# Altium PCB MB_SpectrumAnalyzer.PcbDoc (part 1 of 3)
Units mil, origin at the board's own origin, x right, y up, seen from the top; angles counter-clockwise.
Board outline 6149 x 3004 mil, 2 copper layers (Top Layer, Bottom Layer); 237 components, 180 nets, 644 pads, 101 vias.
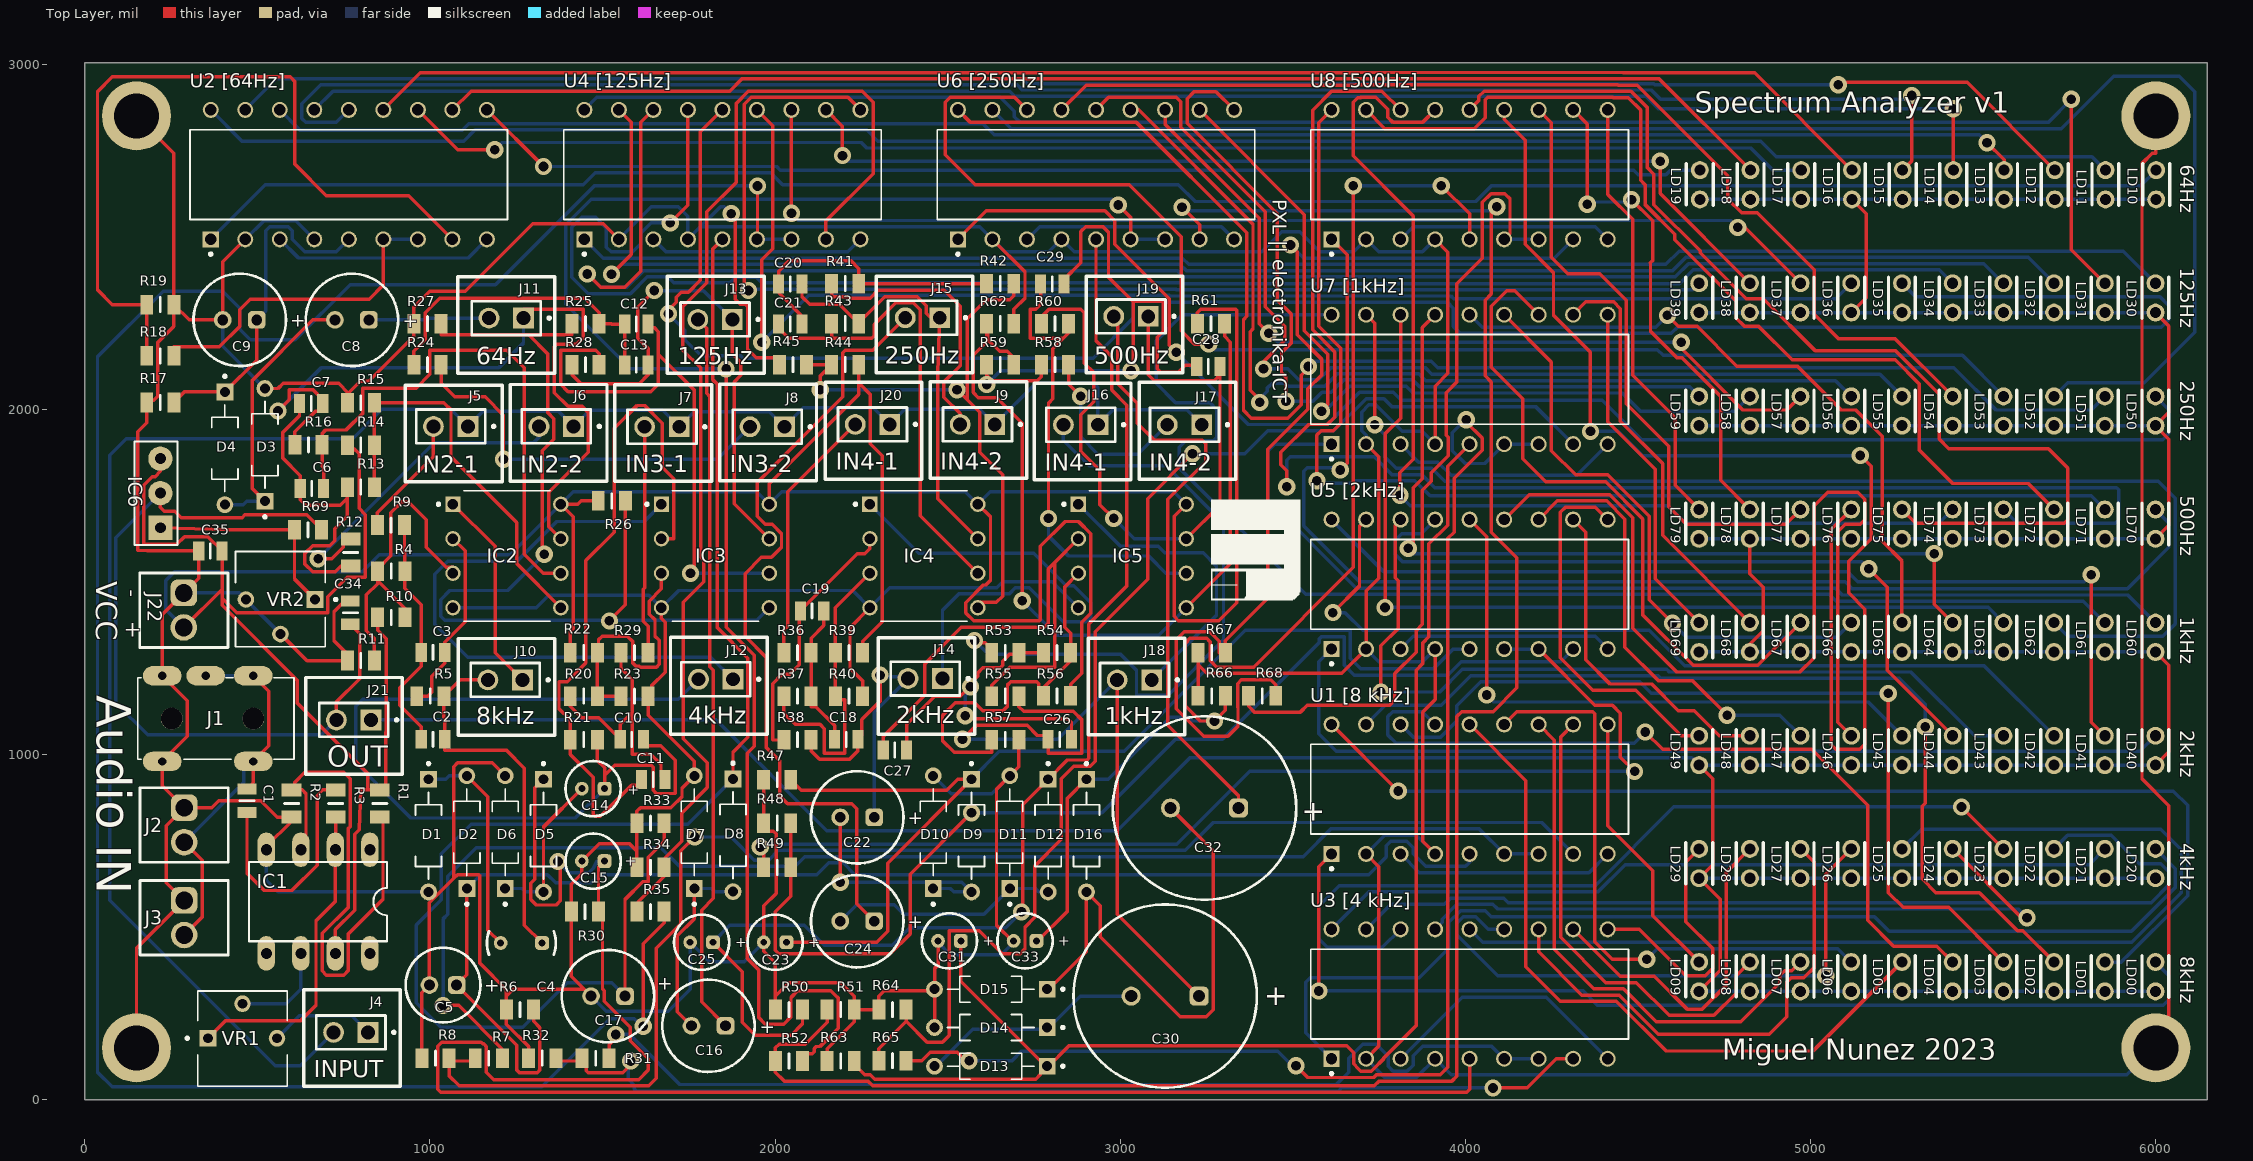
[diagram p0: Top Layer view]
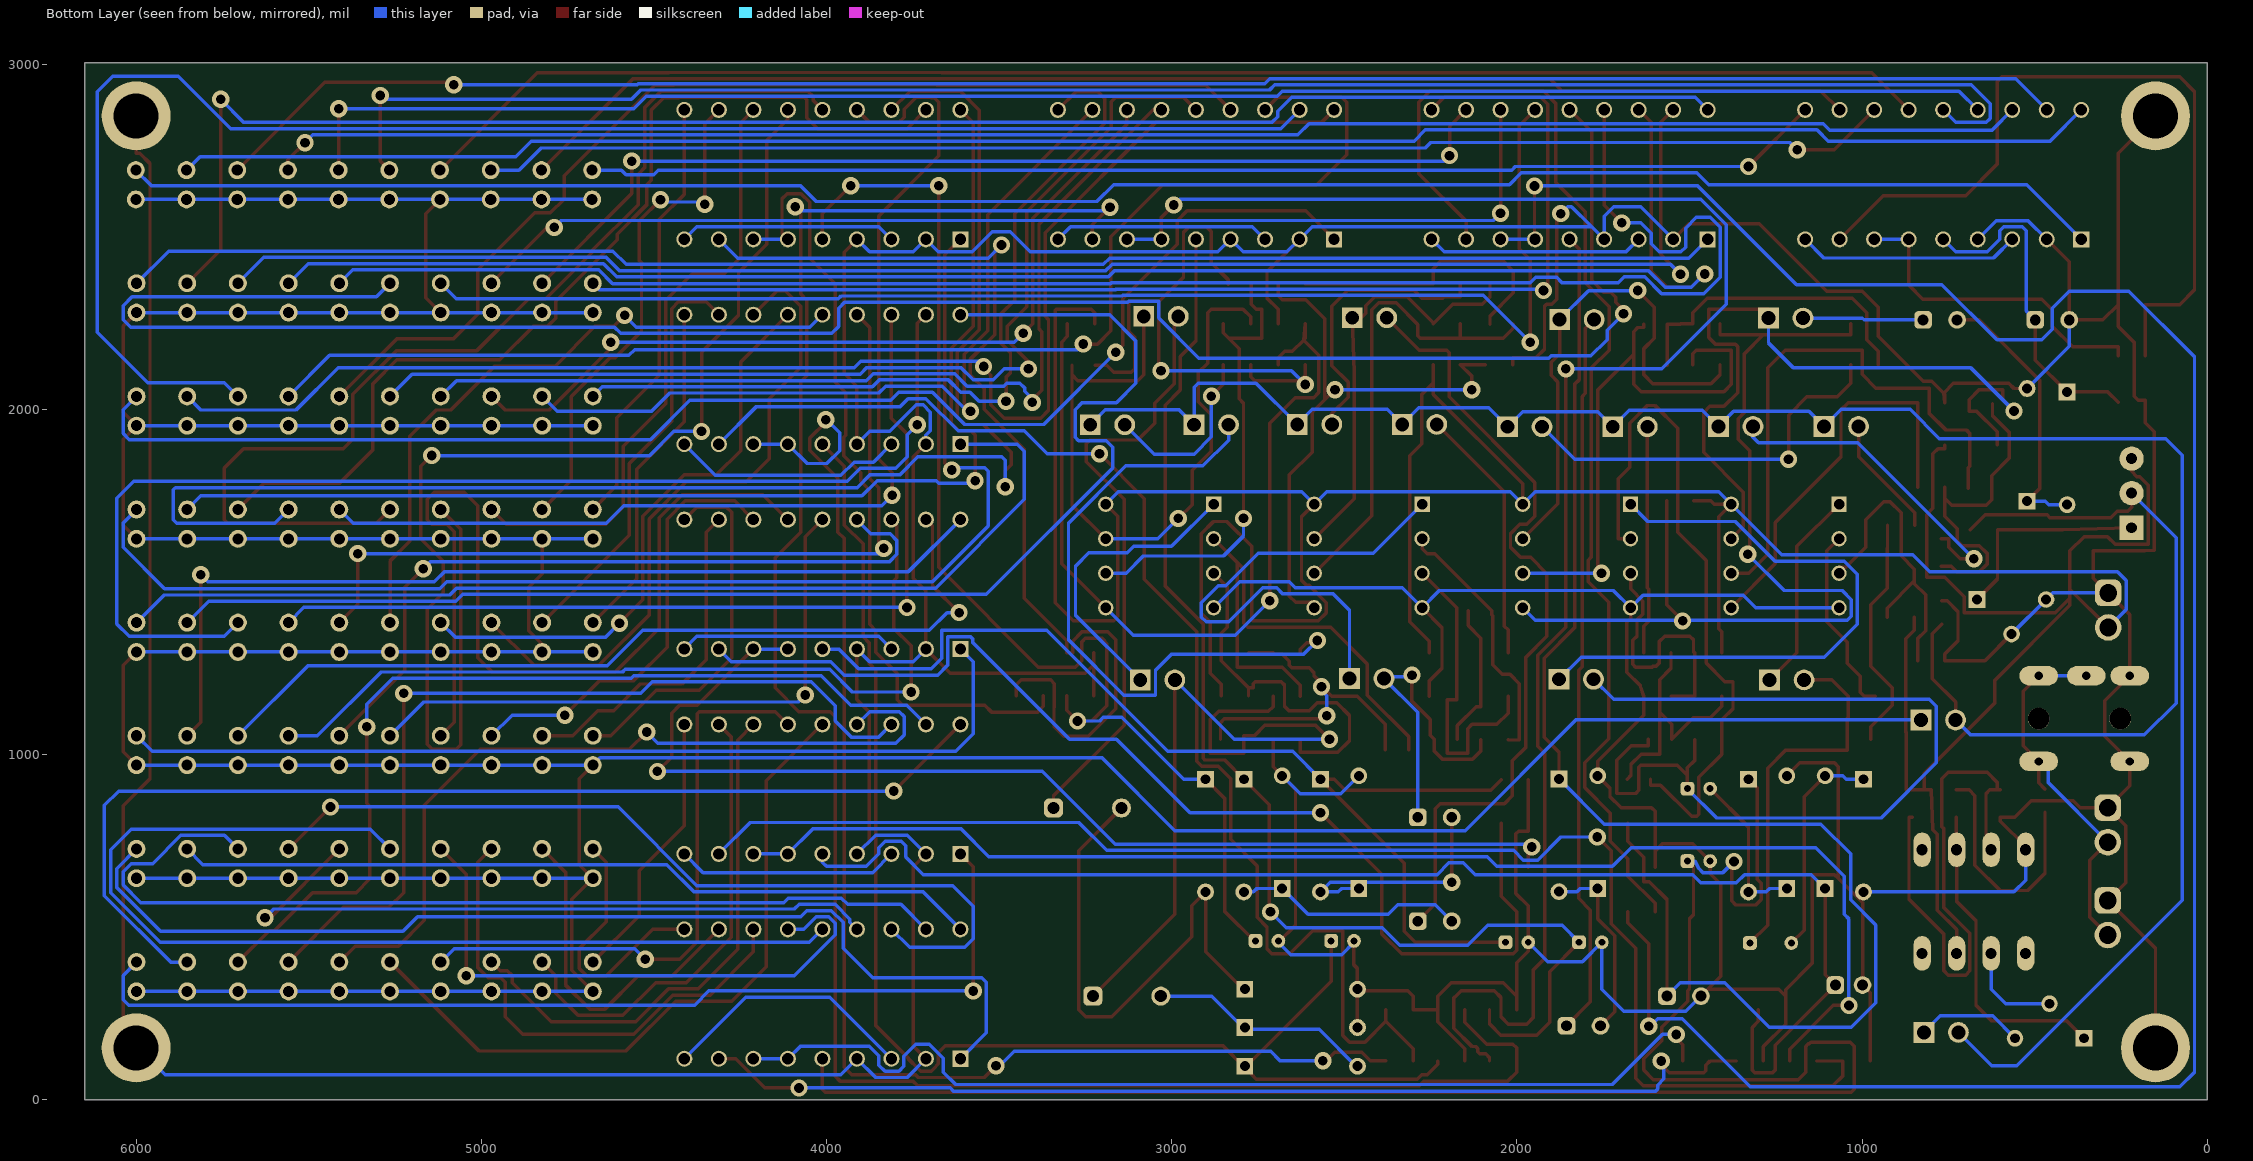
[diagram p1: Bottom Layer view, seen from below]

## Layer stack, top to bottom
Top Solder: solder mask 0.4, Solder Resist, Dk 3.5
Top Layer: signal copper 1.4
Dielectric 1: dielectric 12.6, FR-4, Dk 4.8
Bottom Layer: signal copper 1.4
Bottom Solder: solder mask 0.4, Solder Resist, Dk 3.5

## Board outline
0,0 6149,0 6149,3004 0,3004

## Design rules (kind name [scope] priority, off if disabled: settings)
Clearance [All] p1: gap=8 ignorepadtopadclearanceinfootprint=FALSE except(0: Arc-Hole Track-Hole SMDPad-Hole THPad-Hole Via-Hole Fill-Hole Poly-Hole Region-Hole Text-Hole; 2: Arc-Text Track-Text SMDPad-Text THPad-Text Via-Text Fill-Text Poly-Text Region-Text Text-Text)
Height [All] p1: minheight=0 maxheight=2000 prefheight=500
HoleSize [All] p1: absolutevalues=TRUE maxlimit=250 minlimit=1 maxpercent=80.000 minpercent=20.000
MinimumSolderMaskSliver [All] p1: minsoldermaskwidth=5
PolygonConnect [All] p1: connectstyle=Relief reliefconductorwidth=10 reliefentries=4 polygonreliefangle="90 Angle" airgapwidth=10
RoutingVias [All] p1: holewidth=28 width=50 viastyle="Through Hole" minholewidth=28 minwidth=50 maxholewidth=28 maxwidth=50
SMDNeckDown [All] p1: percent=50.000
SilkToSilkClearance [All] p1: silktosilkclearance=0
SilkToSolderMaskClearance [IsPad] p1: minsilkscreentomaskgap=0 clearancetoexposedcopper=TRUE
SolderMaskExpansion [All] p1: expansion=4 istentingtop=FALSE
Width [All] p1: maxlimit=10 minlimit=10 preferedwidth=10
25 further rules are at their usual default settings.

## Classes and differential pairs
component class spectrum_8kHz_64Hz: C2 C3 C4 C5 C6 C7 C8 C9 D1 D2 D3 D4 IC2 J5 J6 J10 J11 "L 09" LD00 LD01 LD02 LD03 LD04 LD05 LD06 LD07 LD08 LD10 LD11 LD12 LD13 LD14 LD15 LD16 LD17 LD18 LD19 R4 R5 R6 R7 R8 R9 R10 R11 R12 R13 R14 R15 R16 R17 R18 R19 "U1 [8 kHz]" "U2 [64Hz]"
component class spectrum_4kHz_125Hz: C10 C11 C12 C13 C14 C15 C16 C17 D5 D6 D7 D8 IC3 J7 J8 J12 J13 LD20 LD21 LD22 LD23 LD24 LD25 LD26 LD27 LD28 LD29 LD30 LD31 LD32 LD33 LD34 LD35 LD36 LD37 LD38 LD39 R20 R21 R22 R23 R24 R25 R26 R27 R28 R29 R30 R31 R32 R33 R34 R35 "U3 [4 kHz]" "U4 [125Hz]"
component class spectrum_2kHz_250Hz: C18 C19 C20 C21 C22 C23 C24 C25 D9 D10 D11 D12 IC4 J9 J14 J15 J20 LD40 LD41 LD42 LD43 LD44 LD45 LD46 LD47 LD48 LD49 LD50 LD51 LD52 LD53 LD54 LD55 LD56 LD57 LD58 LD59 R36 R37 R38 R39 R40 R41 R42 R43 R44 R45 R47 R48 R49 R50 R51 R52 "U5 [2kHz]" "U6 [250Hz]"
component class spectrum_1kHz_500Hz: C26 C27 C28 C29 C30 C31 C32 C33 D13 D14 D15 D16 IC5 J16 J17 J18 J19 LD60 LD61 LD62 LD63 LD64 LD65 LD66 LD67 LD68 LD69 LD70 LD71 LD72 LD73 LD74 LD75 LD76 LD77 LD78 LD79 R53 R54 R55 R56 R57 R58 R59 R60 R61 R62 R63 R64 R65 R66 R67 R68 "U7 [1kHz]" "U8 [500Hz]"
component class AudioOUT: C34 C35 IC6 J22 R69 VR2
component class AudioIN: C1 IC1 J1 J2 J3 J4 R1 R2 R3 VR1

## Components (designator, comment, footprint, x,y, rotation, side; value= is the part's Value field where it differs from the comment)
C1 "100nF" CAPC2012X65N 470,865.87 r270 top
C2 "10nF" CAPC2012X65N 1009,1044 r0 top
C3 "10nF" CAPC2012X65N 1009,1296 r0 top
C4 "100nF" "100nF keramic disk" 1265,454 r0 top
C5 "1µF" WCAP-ATG8_D5H11 1038,332 r0 top
C6 "330nF" CAPC2012X65N 658,1771 r180 top
C7 "330nF" CAPC2012X65N 656,2016.88 r180 top
C8 "100uF" WCAP-ATG8_D6.3H11 774,2259 r0 top
C9 "47uF" WCAP-ATG8_D6.3H11 449,2259 r0 top
C10 "47nF" CAPC2012X65N 1585,1044 r0 top
C11 "47nF" CAPC2012X65N 1646.87,928 r180 top
C12 "220nF" CAPC2012X65N 1598,2246.82 r180 top
C13 "220nF" CAPC2012X65N 1598,2128 r180 top
C14 "1uF" WCAP-MN_D4H8 1473,901 r0 top
C15 "1uF" WCAP-MN_D4H8 1473,691 r0 top
C16 "47uF" WCAP-ATG8_D6.3H11 1807,214 r0 top
C17 "47uF" WCAP-ATG8_D6.3H11 1516,300 r0 top
C18 "47nF" CAPC2012X65N 2206.13,1044 r0 top
C19 "47nF" CAPC2012X65N 2107.13,1416 r180 top
C20 "220nF" CAPC2012X65N 2044,2362.82 r180 top
C21 "220nF" CAPC2012X65N 2044,2246.82 r0 top
C22 "4,7uF" WCAP-ATG8_D6.3H11 2238,818 r0 top
C23 "1uF" WCAP-MN_D4H8 2000,456 r0 top
C24 "47uF" WCAP-ATG8_D6.3H11 2238,517 r0 top
C25 "1uF" WCAP-MN_D4H8 1787,456 r0 top
C26 "47nF" CAPC2012X65N 2824.75,1044 r180 top
C27 "47nF" CAPC2012X65N 2347,1013 r180 top
C28 "68nF" CAPC2012X65N 3255,2124 r180 top
C29 "68nF" CAPC2012X65N 2803,2362.82 r0 top
C30 "22uF" WCAP-ATG8_D13H20 3130,300 r0 top
C31 "1uF" WCAP-MN_D4H8 2505,460 r0 top
C32 "22uF" WCAP-ATG8_D13H20 3244,845 r0 top
C33 "1uF" WCAP-MN_D4H8 2724,460 r0 top
C34 "1uF" CAPC2012X65N 769.29,1411 r270 top
C35 "100nF" CAPC2012X65N 364,1590 r0 top
D1 "1N4148" DIOAD829W49L456D191 996,765 r270 top
D2 "1N4148" DIOAD829W49L456D191 1107,775 r90 top
D3 "1N4148" DIOAD829W49L456D191 522,1897 r90 top
D4 "1N4148" DIOAD829W49L456D191 406,1887 r270 top
D5 "1N4148" DIOAD829W49L456D191 1329,765 r270 top
D6 "1N4148" DIOAD829W49L456D191 1218,775 r90 top
D7 "1N4148" DIOAD829W49L456D191 1766,775 r90 top
D8 "1N4148" DIOAD829W49L456D191 1878,766 r270 top
D9 "1N4148" DIOAD829W49L456D191 2569,765 r270 top
D10 "1N4148" DIOAD829W49L456D191 2458,775 r90 top
D11 "1N4148" DIOAD829W49L456D191 2680,775 r90 top
D12 "1N4148" DIOAD829W49L456D191 2791,765 r270 top
D13 "1N4148" DIOAD829W49L456D191 2625,97 r180 top
D14 "1N4148" DIOAD829W49L456D191 2625,209 r180 top
D15 "1N4148" DIOAD829W49L456D191 2625,320 r180 top
D16 "1N4148" DIOAD829W49L456D191 2902,765 r270 top
IC1 "TL071" DIL08 676,574 r180 top
IC2 "TL072IP" DIP794W45P254L959H508Q8 1223,1575 r0 top
IC3 "TL072IP" DIP794W45P254L959H508Q8 1827,1575 r0 top
IC4 "TL072IP" DIP794W45P254L959H508Q8 2431,1575 r0 top
IC5 "TL072IP" DIP794W45P254L959H508Q8 3035,1575 r0 top
IC6 "LM317" TO-220 219,1757 r90 top
J1 "PJ-313 3,5mm jack" *PJ-313_PJ-313(Primary) 380,1104 r0 top
J2 "2 pin block connector" 691210910002 287.93,795.86 r270 top
J3 "2 pin block connector" 691210910002 287.93,527 r270 top
J4 "2 pin header" SAMTEC_HTSW-102-07-TM-S 771,195 r0 top
J5 "2 pin header" SAMTEC_HTSW-102-07-TM-S 1060.13,1950.33 r0 top
J6 "2 pin header" SAMTEC_HTSW-102-07-TM-S 1366.13,1950.33 r0 top
J7 "2 pin header" SAMTEC_HTSW-102-07-TM-S 1672.13,1949.33 r0 top
J8 "2 pin header" SAMTEC_HTSW-102-07-TM-S 1977.13,1949.33 r0 top
J9 "2 pin header" SAMTEC_HTSW-102-07-TM-S 2586.13,1956.33 r0 top
J10 "2 pin header" SAMTEC_HTSW-102-07-TM-S 1218,1216 r0 top
J11 "2 pin header" SAMTEC_HTSW-102-07-TM-S 1221.13,2264.33 r0 top
J12 "2 pin header" SAMTEC_HTSW-102-07-TM-S 1828,1218 r0 top
J13 "2 pin header" SAMTEC_HTSW-102-07-TM-S 1826.13,2260.33 r0 top
J14 "2 pin header" SAMTEC_HTSW-102-07-TM-S 2435,1220 r0 top
J15 "2 pin header" SAMTEC_HTSW-102-07-TM-S 2427.13,2265.33 r0 top
J16 "2 pin header" SAMTEC_HTSW-102-07-TM-S 2885.13,1955.33 r0 top
J17 "2 pin header" SAMTEC_HTSW-102-07-TM-S 3186.13,1955.33 r0 top
J18 "2 pin header" SAMTEC_HTSW-102-07-TM-S 3041,1216 r0 top
J19 "2 pin header" SAMTEC_HTSW-102-07-TM-S 3031.13,2269.33 r0 top
J20 "2 pin header" SAMTEC_HTSW-102-07-TM-S 2282.13,1956.33 r0 top
J21 "2 pin header" SAMTEC_HTSW-102-07-TM-S 779,1100 r0 top
J22 "2 pin block connector" 691210910002 287,1418 r270 top
LD00 "LED 2x3x4" "LED 2x3x4mm" 5999,356.71 r90 top (schematic designator LED00)
LD01 "LED 2x3x4" "LED 2x3x4mm" 5852.11,356.71 r90 top (schematic designator LED01)
LD02 "LED 2x3x4" "LED 2x3x4mm" 5705.22,356.71 r90 top (schematic designator LED02)
LD03 "LED 2x3x4" "LED 2x3x4mm" 5558.33,356.71 r90 top (schematic designator LED03)
LD04 "LED 2x3x4" "LED 2x3x4mm" 5411.44,356.71 r90 top (schematic designator LED04)
LD05 "LED 2x3x4" "LED 2x3x4mm" 5264.56,356.71 r90 top (schematic designator LED05)
LD06 "LED 2x3x4" "LED 2x3x4mm" 5117.67,356.71 r90 top (schematic designator LED06)
LD07 "LED 2x3x4" "LED 2x3x4mm" 4970.78,356.71 r90 top (schematic designator LED07)
LD08 "LED 2x3x4" "LED 2x3x4mm" 4823.89,356.71 r90 top (schematic designator LED08)
LD09 "LED 2x3x4" "LED 2x3x4mm" 4677,356.71 r90 top (schematic designator LED09)
LD10 "LED 2x3x4" "LED 2x3x4mm" 6001,2651 r90 top (schematic designator LED10)
LD11 "LED 2x3x4" "LED 2x3x4mm" 5854.11,2651 r90 top (schematic designator LED11)
LD12 "LED 2x3x4" "LED 2x3x4mm" 5707.22,2651 r90 top (schematic designator LED12)
LD13 "LED 2x3x4" "LED 2x3x4mm" 5560.33,2651 r90 top (schematic designator LED13)
LD14 "LED 2x3x4" "LED 2x3x4mm" 5413.44,2651 r90 top (schematic designator LED14)
LD15 "LED 2x3x4" "LED 2x3x4mm" 5266.56,2651 r90 top (schematic designator LED15)
LD16 "LED 2x3x4" "LED 2x3x4mm" 5119.67,2651 r90 top (schematic designator LED16)
LD17 "LED 2x3x4" "LED 2x3x4mm" 4972.78,2651 r90 top (schematic designator LED17)
LD18 "LED 2x3x4" "LED 2x3x4mm" 4825.89,2651 r90 top (schematic designator LED18)
LD19 "LED 2x3x4" "LED 2x3x4mm" 4679,2651 r90 top (schematic designator LED19)
LD20 "LED 2x3x4" "LED 2x3x4mm" 5999,684.47 r90 top (schematic designator LED20)
LD21 "LED 2x3x4" "LED 2x3x4mm" 5852.11,684.47 r90 top (schematic designator LED21)
LD22 "LED 2x3x4" "LED 2x3x4mm" 5705.22,684.47 r90 top (schematic designator LED22)
LD23 "LED 2x3x4" "LED 2x3x4mm" 5558.33,684.47 r90 top (schematic designator LED23)
LD24 "LED 2x3x4" "LED 2x3x4mm" 5411.44,684.47 r90 top (schematic designator LED24)
LD25 "LED 2x3x4" "LED 2x3x4mm" 5264.56,684.47 r90 top (schematic designator LED25)
LD26 "LED 2x3x4" "LED 2x3x4mm" 5117.67,684.47 r90 top (schematic designator LED26)
LD27 "LED 2x3x4" "LED 2x3x4mm" 4970.78,684.47 r90 top (schematic designator LED27)
LD28 "LED 2x3x4" "LED 2x3x4mm" 4823.89,684.47 r90 top (schematic designator LED28)
LD29 "LED 2x3x4" "LED 2x3x4mm" 4677,684.47 r90 top (schematic designator LED29)
LD30 "LED 2x3x4" "LED 2x3x4mm" 5999,2323.24 r90 top (schematic designator LED30)
LD31 "LED 2x3x4" "LED 2x3x4mm" 5852.11,2323.24 r90 top (schematic designator LED31)
LD32 "LED 2x3x4" "LED 2x3x4mm" 5705.22,2323.24 r90 top (schematic designator LED32)
LD33 "LED 2x3x4" "LED 2x3x4mm" 5558.33,2323.24 r90 top (schematic designator LED33)
LD34 "LED 2x3x4" "LED 2x3x4mm" 5411.44,2323.24 r90 top (schematic designator LED34)
LD35 "LED 2x3x4" "LED 2x3x4mm" 5264.56,2323.24 r90 top (schematic designator LED35)
LD36 "LED 2x3x4" "LED 2x3x4mm" 5117.67,2323.24 r90 top (schematic designator LED36)
LD37 "LED 2x3x4" "LED 2x3x4mm" 4970.78,2323.24 r90 top (schematic designator LED37)
LD38 "LED 2x3x4" "LED 2x3x4mm" 4823.89,2323.24 r90 top (schematic designator LED38)
LD39 "LED 2x3x4" "LED 2x3x4mm" 4677,2323.24 r90 top (schematic designator LED39)
LD40 "LED 2x3x4" "LED 2x3x4mm" 5999,1012.22 r90 top (schematic designator LED40)
LD41 "LED 2x3x4" "LED 2x3x4mm" 5852.11,1012.22 r90 top (schematic designator LED41)
LD42 "LED 2x3x4" "LED 2x3x4mm" 5705.22,1012.22 r90 top (schematic designator LED42)
LD43 "LED 2x3x4" "LED 2x3x4mm" 5558.33,1012.22 r90 top (schematic designator LED43)
LD44 "LED 2x3x4" "LED 2x3x4mm" 5411.44,1012.22 r90 top (schematic designator LED44)
LD45 "LED 2x3x4" "LED 2x3x4mm" 5264.56,1012.22 r90 top (schematic designator LED45)
LD46 "LED 2x3x4" "LED 2x3x4mm" 5117.67,1012.22 r90 top (schematic designator LED46)
LD47 "LED 2x3x4" "LED 2x3x4mm" 4970.78,1012.22 r90 top (schematic designator LED47)
LD48 "LED 2x3x4" "LED 2x3x4mm" 4823.89,1012.22 r90 top (schematic designator LED48)
LD49 "LED 2x3x4" "LED 2x3x4mm" 4677,1012.22 r90 top (schematic designator LED49)
LD50 "LED 2x3x4" "LED 2x3x4mm" 5999,1995.49 r90 top (schematic designator LED50)
LD51 "LED 2x3x4" "LED 2x3x4mm" 5852.11,1995.49 r90 top (schematic designator LED51)
LD52 "LED 2x3x4" "LED 2x3x4mm" 5705.22,1995.49 r90 top (schematic designator LED52)
LD53 "LED 2x3x4" "LED 2x3x4mm" 5558.33,1995.49 r90 top (schematic designator LED53)
LD54 "LED 2x3x4" "LED 2x3x4mm" 5411.44,1995.49 r90 top (schematic designator LED54)
LD55 "LED 2x3x4" "LED 2x3x4mm" 5264.56,1995.49 r90 top (schematic designator LED55)
LD56 "LED 2x3x4" "LED 2x3x4mm" 5117.67,1995.49 r90 top (schematic designator LED56)
LD57 "LED 2x3x4" "LED 2x3x4mm" 4970.78,1995.49 r90 top (schematic designator LED57)
LD58 "LED 2x3x4" "LED 2x3x4mm" 4823.89,1995.49 r90 top (schematic designator LED58)
LD59 "LED 2x3x4" "LED 2x3x4mm" 4677,1995.49 r90 top (schematic designator LED59)
LD60 "LED 2x3x4" "LED 2x3x4mm" 5999,1339.98 r90 top (schematic designator LED60)
LD61 "LED 2x3x4" "LED 2x3x4mm" 5852.11,1339.98 r90 top (schematic designator LED61)
LD62 "LED 2x3x4" "LED 2x3x4mm" 5705.22,1339.98 r90 top (schematic designator LED62)
LD63 "LED 2x3x4" "LED 2x3x4mm" 5558.33,1339.98 r90 top (schematic designator LED63)
LD64 "LED 2x3x4" "LED 2x3x4mm" 5411.44,1339.98 r90 top (schematic designator LED64)
LD65 "LED 2x3x4" "LED 2x3x4mm" 5264.56,1339.98 r90 top (schematic designator LED65)
LD66 "LED 2x3x4" "LED 2x3x4mm" 5117.67,1339.98 r90 top (schematic designator LED66)
LD67 "LED 2x3x4" "LED 2x3x4mm" 4970.78,1339.98 r90 top (schematic designator LED67)
LD68 "LED 2x3x4" "LED 2x3x4mm" 4823.89,1339.98 r90 top (schematic designator LED68)
LD69 "LED 2x3x4" "LED 2x3x4mm" 4677,1339.98 r90 top (schematic designator LED69)
LD70 "LED 2x3x4" "LED 2x3x4mm" 5999,1667.73 r90 top (schematic designator LED70)
LD71 "LED 2x3x4" "LED 2x3x4mm" 5852.11,1667.73 r90 top (schematic designator LED71)
LD72 "LED 2x3x4" "LED 2x3x4mm" 5705.22,1667.73 r90 top (schematic designator LED72)
LD73 "LED 2x3x4" "LED 2x3x4mm" 5558.33,1667.73 r90 top (schematic designator LED73)
LD74 "LED 2x3x4" "LED 2x3x4mm" 5411.44,1667.73 r90 top (schematic designator LED74)
LD75 "LED 2x3x4" "LED 2x3x4mm" 5264.56,1667.73 r90 top (schematic designator LED75)
LD76 "LED 2x3x4" "LED 2x3x4mm" 5117.67,1667.73 r90 top (schematic designator LED76)
LD77 "LED 2x3x4" "LED 2x3x4mm" 4970.78,1667.73 r90 top (schematic designator LED77)
LD78 "LED 2x3x4" "LED 2x3x4mm" 4823.89,1667.73 r90 top (schematic designator LED78)
LD79 "LED 2x3x4" "LED 2x3x4mm" 4677,1667.73 r90 top (schematic designator LED79)
R1 "4,7k" RESC2012X50N 855,858 r270 top
R2 "4,7k" RESC2012X50N 599.12,858 r270 top
R3 "4,7k" RESC2012X50N 727.06,858 r270 top
R4 "100" RESC2012X50N 888,1531.09 r0 top
R5 "39k" RESC2012X50N 1001.13,1169 r0 top
R6 "22k" RESC2012X50N 1261,261 r0 top
R7 "1,2k" RESC2012X50N 1170.67,120 r180 top
R8 "910" RESC2012X50N 1016,120 r180 top
R9 "20k" RESC2012X50N 887,1664.67 r0 top
R10 "4,7k" RESC2012X50N 888,1397.5 r180 top
R11 "4,7k" RESC2012X50N 800,1272 r0 top
R12 "75k" RESC2012X50N 770.47,1585 r90 top
R13 "390" RESC2012X50N 800,1774.33 r180 top
R14 "4,7k" RESC2012X50N 800,1896 r180 top
R15 "4,7k" RESC2012X50N 800,2019 r180 top
R16 "150k" RESC2012X50N 648.13,1897 r0 top
R17 "4,7k" RESC2012X50N 219,2020 r0 top
R18 "1,2k" RESC2012X50N 219,2155 r180 top
R19 "910" RESC2012X50N 219,2303 r0 top
R20 "43" RESC2012X50N 1446,1169 r180 top
R21 "16,2k" RESC2012X50N 1446,1042.82 r0 top
R22 "4,7k" RESC2012X50N 1446,1294.82 r180 top
R23 "4,7k" RESC2012X50N 1592.87,1169 r180 top
R24 "56k" RESC2012X50N 993,2129.18 r0 top
R25 "301" RESC2012X50N 1451,2248 r0 top
R26 "4,7k" RESC2012X50N 1527,1735 r180 top
R27 "4,7k" RESC2012X50N 993,2248 r180 top
R28 "120k" RESC2012X50N 1451,2129.18 r0 top
R29 "8,2k" RESC2012X50N 1592.87,1294.82 r180 top
R30 "22k" RESC2012X50N 1449,545 r0 top
R31 "1,2k" RESC2012X50N 1480,120 r180 top
R32 "910" RESC2012X50N 1325.33,120 r180 top
R33 "4,7k" RESC2012X50N 1639,801.12 r0 top
R34 "910" RESC2012X50N 1639,673.06 r180 top
R35 "1,2k" RESC2012X50N 1639,545 r180 top
R36 "16,2k" RESC2012X50N 2065,1294.82 r0 top
R37 "82" RESC2012X50N 2065,1169 r0 top
R38 "33k" RESC2012X50N 2065,1042.82 r0 top
R39 "4,7k" RESC2012X50N 2214,1294.82 r0 top
R40 "4,7k" RESC2012X50N 2214,1169 r180 top
R41 "30k" RESC2012X50N 2203,2364 r180 top
R42 "150" RESC2012X50N 2652,2364 r180 top
R43 "56k" RESC2012X50N 2203,2248 r180 top
R44 "4,7k" RESC2012X50N 2203,2129.18 r0 top
R45 "4,7k" RESC2012X50N 2051.87,2129.18 r180 top
R47 "22k" RESC2012X50N 2006,926.82 r0 top
R48 "910" RESC2012X50N 2006,801.12 r180 top
R49 "1,2k" RESC2012X50N 2006,673.06 r0 top
R50 "36k" RESC2012X50N 2040,261 r0 top
R51 "910" RESC2012X50N 2190,261 r0 top
R52 "1,2k" RESC2012X50N 2040,112 r180 top
R53 "33k" RESC2012X50N 2667,1294.82 r0 top
R54 "160" RESC2012X50N 2816.87,1294.82 r180 top
R55 "68k" RESC2012X50N 2667,1168.82 r0 top
R56 "4,7k" RESC2012X50N 2816.87,1170 r0 top
R57 "4,7k" RESC2012X50N 2667,1042.82 r180 top
R58 "47k" RESC2012X50N 2810.87,2129.18 r0 top
R59 "240" RESC2012X50N 2652,2129.18 r180 top
R60 "91k" RESC2012X50N 2810.87,2248 r0 top
R61 "4,7k" RESC2012X50N 3262.87,2248 r180 top
R62 "4,7k" RESC2012X50N 2652,2248 r0 top
R63 "36k" RESC2012X50N 2190,112 r0 top
R64 "910" RESC2012X50N 2340,261 r180 top
R65 "1,2k" RESC2012X50N 2340,113 r180 top
R66 "36k" RESC2012X50N 3265,1170 r0 top
R67 "910" RESC2012X50N 3265,1294.82 r180 top
R68 "1,2k" RESC2012X50N 3411,1170 r0 top
R69 "252" RESC2012X50N 647,1651 r180 top
"U1 [8 kHz]" "LM3915" DIP952W45P254L2336H533Q18 4012,899.5 r90 top (schematic designator U1)
"U2 [64Hz]" "LM3915" DIP952W45P254L2336H533Q18 765,2680 r90 top (schematic designator U2)
"U3 [4 kHz]" "LM3915" DIP952W45P254L2336H533Q18 4012,306 r90 top (schematic designator U3)
"U4 [125Hz]" "LM3915" DIP952W45P254L2336H533Q18 1847.33,2680 r90 top (schematic designator U4)
"U5 [2kHz]" "LM3915" DIP952W45P254L2336H533Q18 4012,1493 r90 top (schematic designator U5)
"U6 [250Hz]" "LM3915" DIP952W45P254L2336H533Q18 2929.67,2680 r90 top (schematic designator U6)
"U7 [1kHz]" "LM3915" DIP952W45P254L2336H533Q18 4012,2086.5 r90 top (schematic designator U7)
"U8 [500Hz]" "LM3915" DIP952W45P254L2336H533Q18 4012,2680 r90 top (schematic designator U8)
VR1 "500k" TRIM_3362P-1-253LF 457,178 r0 top
VR2 "500k" TRIM_3362P-1-253LF 567,1449 r180 top

## Footprints (in the part's own frame and the unit in brackets; to place one, negate y for a bottom-side part, rotate by r counter-clockwise, add the part's x,y. Pads: shape width x height; smd on the part's side, far side on the other; paste and mask are expansions set on the pad)
"100nF keramic disk" [mil] "100nF keramic disk cap"
  rrect50% 40x40 hole 20: 1(60,0)
  round 40 hole 20: 2(-60,0)
  silkscreen extent -100,-34 100,34, body extent -98,-81 98,82, height 10
691210910002 [mm] "2,54mm - modular - green - Horizontal wire entry - Cage clamp - 0,8mm2 wires - 02p"
  rrect50% 1.95x1.95 hole 1.3: 1(-1.27,0)
  round 1.95 hole 1.3: 2(1.27,0)
  silkscreen extent -2.74,-3.25 2.74,3.25, body extent -2.74,-3.25 2.74,3.25, height 8.55
*PJ-313_PJ-313(Primary) [mm]
  oval 2.845x1.422 hole 0.6: 2_1(-3.95,3.15) 2_2(-3.95,-3.15) 3(-0.75,3.15) 4_1(2.75,3.15) 4_2(2.75,-3.15)
  round 1.6 hole 1.6 unplated: None(-3.25,0) None(2.75,0)
  silkscreen extent -5.75,-3 5.75,3
CAPC2012X65N [mm]
  rect 0.83x1.39 smd: 1(-0.86,0) 2(0.86,0)
  silkscreen extent 0,-0.53 0,0.53, body extent -1,-0.63 1,0.63, height 0.65
DIL08 [mil]
  oval 50x100 hole 32: 1(-150,-150) 2(-50,-150) 3(50,-150) 4(150,-150) 5(150,150) 6(50,150) 7(-50,150) 8(-150,150)
  silkscreen extent -200,-115 200,115
DIOAD829W49L456D191 [mm]
  round 1.238 hole 0.73: A(4.146,0)
  rect 1.238x1.238 / inner round 1.238 / far side rect 1.238x1.238 hole 0.73: C(-4.146,0)
  silkscreen extent -5.4,-0.96 3.2,0.96, body extent -5.59,-1.27 5.33,1.27, height 0.25
DIP794W45P254L959H508Q8 [mm]
  rect 1.13x1.13 / inner round 1.13 / far side rect 1.13x1.13 hole 0.78: 1(-3.97,3.81)
  round 1.13 hole 0.78: 2(-3.97,1.27) 3(-3.97,-1.27) 4(-3.97,-3.81) 5(3.97,-3.81) 6(3.97,-1.27) 7(3.97,1.27) 8(3.97,3.81)
  silkscreen extent -5.13,-4.8 3.17,4.8, body extent -3.94,-4.79 3.94,4.79, height 5.08
DIP952W45P254L2336H533Q18 [mm]
  rect 1.18x1.18 hole 0.83: 1(-4.763,10.16)
  round 1.18 hole 0.83: 2(-4.763,7.62) 3(-4.763,5.08) 4(-4.763,2.54) 5(-4.763,0) 6(-4.763,-2.54) 7(-4.763,-5.08) 8(-4.762,-7.62) 9(-4.762,-10.16) 10(4.763,-10.16) 11(4.763,-7.62) 12(4.763,-5.08) 13(4.763,-2.54) 14(4.763,0) 15(4.763,2.54) 16(4.763,5.08) 17(4.762,7.62) 18(4.762,10.16)
  silkscreen extent -5.95,-11.68 3.3,11.68
"LED 2x3x4mm" [mil]
  round 52 hole 32: A(-43,0) K(42,0)
  silkscreen extent -60,-39 60,39, body extent -75,-45 75,45, height 10
RESC2012X50N [mm]
  rect 0.95x1.45 smd: 1(-1,0) 2(1,0)
  silkscreen extent 0,-0.53 0,0.53, body extent -1.02,-0.63 1.02,0.63, height 0.5
SAMTEC_HTSW-102-07-TM-S [mm]
  rect 1.53x1.53 hole 1.02: 01(1.27,0)
  round 1.53 hole 1.02: 02(-1.27,0)
  silkscreen extent -2.54,-1.24 3.26,1.24
TO-220 [mil]
  rect 70x70 / inner round 70 / far side rect 70x70 hole 31.5: 1(-100,0)
  round 70 hole 31.5: 2(0,0) 3(100,0)
  silkscreen extent -150,-50 150,75, body extent -196,-69 196,106, height 1182
TRIM_3362P-1-253LF [mil]
  rect 48.11x48.11 hole 28.11: 1(-100,0)
  round 48.11 hole 28.11: 2(0,100) 3(100,0)
  silkscreen extent -164,-139 130,137, body extent -61,-31 61,31, height 26
WCAP-ATG8_D5H11 [mm] "Aluminum Electrolytic Capacitors, 5x11mm"
  rrect50% 1.3x1.3 hole 0.8: 1(1,0)
  round 1.3 hole 0.8: 2(-1,0)
  silkscreen extent -2.75,-2.75 2.75,2.75, body extent -2.49,-2.5 2.5,2.5, height 11.31
WCAP-ATG8_D6.3H11 [mm] "Aluminum Electrolytic Capacitors, 6.3x11mm"
  rrect50% 1.3x1.3 hole 0.8: 1(1.25,0)
  round 1.3 hole 0.8: 2(-1.25,0)
  silkscreen extent -3.4,-3.4 3.4,3.4, body extent -3.14,-3.15 3.15,3.15, height 11.31
WCAP-ATG8_D13H20 [mm] "Aluminum Electrolytic Capacitors, 13x20mm"
  rrect50% 1.4x1.4 hole 0.9: 1(2.5,0)
  round 1.4 hole 0.9: 2(-2.5,0)
  silkscreen extent -6.75,-6.75 6.75,6.75, body extent -6.49,-6.5 6.5,6.5, height 20.31
WCAP-MN_D4H8 [mil] "Aluminum Electrolytic Capacitors, 5x11mm"
  rrect50% 40x40 hole 20: 1(33,0)
  round 40 hole 20: 2(-33,0)
  silkscreen extent -80,-80 80,80, body extent -75,-75 75,75, height 300

## Part data
C1: library part 885012004008, "100nF Keramic cap", Capacitance=22pF, Capacitance Tolerance=+/-5%, Case/Size Code=0201, Insulation Resistance=10GΩ, Manufacturer="Wurth Elektronik", Operating Temperature Max=125°C, Operating Temperature Min=-55°C, Rated Voltage (DC)=25V, Category="Multilayer Ceramic Chip Capacitors", Ceramic Type="NP0 Class I", ComponentLink1Description="Website Link", ComponentLink1URL=https://www.we-online.com/redexpert/article/885012004008?ad, ComponentLink2Description="Datasheet Link", ComponentLink2URL=https://www.we-online.com/redexpert/spec/885012004008?ad, Height=0.3mm, Length=0.6mm, Manufacturer Part Number=885012004008, Match Code=WCAP-CSGP, Mount="Surface Mount", Packaging="Tape and Reel", Q Factor=840, Technical Reference=NP00201220J025DFCT10000, Width=0.3mm
C2 C3: library part 885012004008, "10nF ceramic", Capacitance=22pF, Capacitance Tolerance=+/-5%, Case/Size Code=0201, Insulation Resistance=10GΩ, Manufacturer="Wurth Elektronik", Operating Temperature Max=125°C, Operating Temperature Min=-55°C, Rated Voltage (DC)=25V, Category="Multilayer Ceramic Chip Capacitors", Ceramic Type="NP0 Class I", ComponentLink1Description="Website Link", ComponentLink1URL=https://www.we-online.com/redexpert/article/885012004008?ad, ComponentLink2Description="Datasheet Link", ComponentLink2URL=https://www.we-online.com/redexpert/spec/885012004008?ad, Height=0.3mm, Length=0.6mm, Manufacturer Part Number=885012004008, Match Code=WCAP-CSGP, Mount="Surface Mount", Packaging="Tape and Reel", Q Factor=840, Technical Reference=NP00201220J025DFCT10000, Width=0.3mm
C4: library part 860010272005, "Elco 100nF", Capacitance=100µF, Capacitance Tolerance=+/-20%, Leakage Current=10µA, Manufacturer="Wurth Elektronik", Operating Temperature Max=85°C, Operating Temperature Min=-40°C, Rated Voltage (DC)=10V, Ripple Current=198mA, Category="Aluminum Electrolytic Capacitors", ComponentLink1Description="Website Link", ComponentLink1URL=https://www.we-online.com/redexpert/article/860010272005?ad, ComponentLink2Description="Datasheet Link", ComponentLink2URL=https://www.we-online.com/redexpert/spec/860010272005?ad, Diameter=5mm, Dissipation Factor=19%, Endurance=2000h, Height=11mm, Manufacturer Part Number=860010272005, Match Code=WCAP-ATG8, Mount="Through Hole", Packaging="Ammo Pack", Technical Reference=ATBC110101M010DSPA3B000
C5 C15 C23 C31: library part 860010272005, "WCAP-ATG8 Aluminum Electrolytic Capacitor, Radial, THT, D5 x H11mm, 1uF, 10V", Capacitance=100µF, Capacitance Tolerance=+/-20%, Leakage Current=10µA, Manufacturer="Wurth Elektronik", Operating Temperature Max=85°C, Operating Temperature Min=-40°C, Rated Voltage (DC)=10V, Ripple Current=198mA, Category="Aluminum Electrolytic Capacitors", ComponentLink1Description="Website Link", ComponentLink1URL=https://www.we-online.com/redexpert/article/860010272005?ad, ComponentLink2Description="Datasheet Link", ComponentLink2URL=https://www.we-online.com/redexpert/spec/860010272005?ad, Diameter=5mm, Dissipation Factor=19%, Endurance=2000h, Height=11mm, Manufacturer Part Number=860010272005, Match Code=WCAP-ATG8, Mount="Through Hole", Packaging="Ammo Pack", Technical Reference=ATBC110101M010DSPA3B000
C6 C7: library part 885012004008, "330nF ceramic", Capacitance=22pF, Capacitance Tolerance=+/-5%, Case/Size Code=0201, Insulation Resistance=10GΩ, Manufacturer="Wurth Elektronik", Operating Temperature Max=125°C, Operating Temperature Min=-55°C, Rated Voltage (DC)=25V, Category="Multilayer Ceramic Chip Capacitors", Ceramic Type="NP0 Class I", ComponentLink1Description="Website Link", ComponentLink1URL=https://www.we-online.com/redexpert/article/885012004008?ad, ComponentLink2Description="Datasheet Link", ComponentLink2URL=https://www.we-online.com/redexpert/spec/885012004008?ad, Height=0.3mm, Length=0.6mm, Manufacturer Part Number=885012004008, Match Code=WCAP-CSGP, Mount="Surface Mount", Packaging="Tape and Reel", Q Factor=840, Technical Reference=NP00201220J025DFCT10000, Width=0.3mm
C8: library part 860010272005, "Elco 100uF", Capacitance=100µF, Capacitance Tolerance=+/-20%, Leakage Current=10µA, Manufacturer="Wurth Elektronik", Operating Temperature Max=85°C, Operating Temperature Min=-40°C, Rated Voltage (DC)=10V, Ripple Current=198mA, Category="Aluminum Electrolytic Capacitors", ComponentLink1Description="Website Link", ComponentLink1URL=https://www.we-online.com/redexpert/article/860010272005?ad, ComponentLink2Description="Datasheet Link", ComponentLink2URL=https://www.we-online.com/redexpert/spec/860010272005?ad, Diameter=5mm, Dissipation Factor=19%, Endurance=2000h, Height=11mm, Manufacturer Part Number=860010272005, Match Code=WCAP-ATG8, Mount="Through Hole", Packaging="Ammo Pack", Technical Reference=ATBC110101M010DSPA3B000
C9 C17: library part 860010272005, "WCAP-ATG8 Aluminum Electrolytic Capacitor, Radial, THT, D5 x H11mm, 47µF, 10V", Capacitance=100µF, Capacitance Tolerance=+/-20%, Leakage Current=10µA, Manufacturer="Wurth Elektronik", Operating Temperature Max=85°C, Operating Temperature Min=-40°C, Rated Voltage (DC)=10V, Ripple Current=198mA, Category="Aluminum Electrolytic Capacitors", ComponentLink1Description="Website Link", ComponentLink1URL=https://www.we-online.com/redexpert/article/860010272005?ad, ComponentLink2Description="Datasheet Link", ComponentLink2URL=https://www.we-online.com/redexpert/spec/860010272005?ad, Diameter=5mm, Dissipation Factor=19%, Endurance=2000h, Height=11mm, Manufacturer Part Number=860010272005, Match Code=WCAP-ATG8, Mount="Through Hole", Packaging="Ammo Pack", Technical Reference=ATBC110101M010DSPA3B000
C10 C11 C18 C19 C26 C27: library part 885012004008, "47nF ceramic", Capacitance=22pF, Capacitance Tolerance=+/-5%, Case/Size Code=0201, Insulation Resistance=10GΩ, Manufacturer="Wurth Elektronik", Operating Temperature Max=125°C, Operating Temperature Min=-55°C, Rated Voltage (DC)=25V, Category="Multilayer Ceramic Chip Capacitors", Ceramic Type="NP0 Class I", ComponentLink1Description="Website Link", ComponentLink1URL=https://www.we-online.com/redexpert/article/885012004008?ad, ComponentLink2Description="Datasheet Link", ComponentLink2URL=https://www.we-online.com/redexpert/spec/885012004008?ad, Height=0.3mm, Length=0.6mm, Manufacturer Part Number=885012004008, Match Code=WCAP-CSGP, Mount="Surface Mount", Packaging="Tape and Reel", Q Factor=840, Technical Reference=NP00201220J025DFCT10000, Width=0.3mm
C12 C13 C20 C21: library part 885012004008, "220nF ceramic", Capacitance=22pF, Capacitance Tolerance=+/-5%, Case/Size Code=0201, Insulation Resistance=10GΩ, Manufacturer="Wurth Elektronik", Operating Temperature Max=125°C, Operating Temperature Min=-55°C, Rated Voltage (DC)=25V, Category="Multilayer Ceramic Chip Capacitors", Ceramic Type="NP0 Class I", ComponentLink1Description="Website Link", ComponentLink1URL=https://www.we-online.com/redexpert/article/885012004008?ad, ComponentLink2Description="Datasheet Link", ComponentLink2URL=https://www.we-online.com/redexpert/spec/885012004008?ad, Height=0.3mm, Length=0.6mm, Manufacturer Part Number=885012004008, Match Code=WCAP-CSGP, Mount="Surface Mount", Packaging="Tape and Reel", Q Factor=840, Technical Reference=NP00201220J025DFCT10000, Width=0.3mm
C14: library part 860010272005, "Elco 1uF", Capacitance=100µF, Capacitance Tolerance=+/-20%, Leakage Current=10µA, Manufacturer="Wurth Elektronik", Operating Temperature Max=85°C, Operating Temperature Min=-40°C, Rated Voltage (DC)=10V, Ripple Current=198mA, Category="Aluminum Electrolytic Capacitors", ComponentLink1Description="Website Link", ComponentLink1URL=https://www.we-online.com/redexpert/article/860010272005?ad, ComponentLink2Description="Datasheet Link", ComponentLink2URL=https://www.we-online.com/redexpert/spec/860010272005?ad, Diameter=5mm, Dissipation Factor=19%, Endurance=2000h, Height=11mm, Manufacturer Part Number=860010272005, Match Code=WCAP-ATG8, Mount="Through Hole", Packaging="Ammo Pack", Technical Reference=ATBC110101M010DSPA3B000
C16 C24: library part 860010272005, "Elco 47uF", Capacitance=100µF, Capacitance Tolerance=+/-20%, Leakage Current=10µA, Manufacturer="Wurth Elektronik", Operating Temperature Max=85°C, Operating Temperature Min=-40°C, Rated Voltage (DC)=10V, Ripple Current=198mA, Category="Aluminum Electrolytic Capacitors", ComponentLink1Description="Website Link", ComponentLink1URL=https://www.we-online.com/redexpert/article/860010272005?ad, ComponentLink2Description="Datasheet Link", ComponentLink2URL=https://www.we-online.com/redexpert/spec/860010272005?ad, Diameter=5mm, Dissipation Factor=19%, Endurance=2000h, Height=11mm, Manufacturer Part Number=860010272005, Match Code=WCAP-ATG8, Mount="Through Hole", Packaging="Ammo Pack", Technical Reference=ATBC110101M010DSPA3B000
C22: library part 860010272005, "Elco 4,7uF", Capacitance=100µF, Capacitance Tolerance=+/-20%, Leakage Current=10µA, Manufacturer="Wurth Elektronik", Operating Temperature Max=85°C, Operating Temperature Min=-40°C, Rated Voltage (DC)=10V, Ripple Current=198mA, Category="Aluminum Electrolytic Capacitors", ComponentLink1Description="Website Link", ComponentLink1URL=https://www.we-online.com/redexpert/article/860010272005?ad, ComponentLink2Description="Datasheet Link", ComponentLink2URL=https://www.we-online.com/redexpert/spec/860010272005?ad, Diameter=5mm, Dissipation Factor=19%, Endurance=2000h, Height=11mm, Manufacturer Part Number=860010272005, Match Code=WCAP-ATG8, Mount="Through Hole", Packaging="Ammo Pack", Technical Reference=ATBC110101M010DSPA3B000
C25 C33: library part 860010272005, "WCAP-ATG8 Aluminum Electrolytic Capacitor, Radial, THT, D5 x H11mm, 1µF, 10V", Capacitance=100µF, Capacitance Tolerance=+/-20%, Leakage Current=10µA, Manufacturer="Wurth Elektronik", Operating Temperature Max=85°C, Operating Temperature Min=-40°C, Rated Voltage (DC)=10V, Ripple Current=198mA, Category="Aluminum Electrolytic Capacitors", ComponentLink1Description="Website Link", ComponentLink1URL=https://www.we-online.com/redexpert/article/860010272005?ad, ComponentLink2Description="Datasheet Link", ComponentLink2URL=https://www.we-online.com/redexpert/spec/860010272005?ad, Diameter=5mm, Dissipation Factor=19%, Endurance=2000h, Height=11mm, Manufacturer Part Number=860010272005, Match Code=WCAP-ATG8, Mount="Through Hole", Packaging="Ammo Pack", Technical Reference=ATBC110101M010DSPA3B000
C28 C29: library part 885012004008, "68nF ceramic", Capacitance=22pF, Capacitance Tolerance=+/-5%, Case/Size Code=0201, Insulation Resistance=10GΩ, Manufacturer="Wurth Elektronik", Operating Temperature Max=125°C, Operating Temperature Min=-55°C, Rated Voltage (DC)=25V, Category="Multilayer Ceramic Chip Capacitors", Ceramic Type="NP0 Class I", ComponentLink1Description="Website Link", ComponentLink1URL=https://www.we-online.com/redexpert/article/885012004008?ad, ComponentLink2Description="Datasheet Link", ComponentLink2URL=https://www.we-online.com/redexpert/spec/885012004008?ad, Height=0.3mm, Length=0.6mm, Manufacturer Part Number=885012004008, Match Code=WCAP-CSGP, Mount="Surface Mount", Packaging="Tape and Reel", Q Factor=840, Technical Reference=NP00201220J025DFCT10000, Width=0.3mm
C30 C32: library part 860010272005, "Elco 22uF", Capacitance=100µF, Capacitance Tolerance=+/-20%, Leakage Current=10µA, Manufacturer="Wurth Elektronik", Operating Temperature Max=85°C, Operating Temperature Min=-40°C, Rated Voltage (DC)=10V, Ripple Current=198mA, Category="Aluminum Electrolytic Capacitors", ComponentLink1Description="Website Link", ComponentLink1URL=https://www.we-online.com/redexpert/article/860010272005?ad, ComponentLink2Description="Datasheet Link", ComponentLink2URL=https://www.we-online.com/redexpert/spec/860010272005?ad, Diameter=5mm, Dissipation Factor=19%, Endurance=2000h, Height=11mm, Manufacturer Part Number=860010272005, Match Code=WCAP-ATG8, Mount="Through Hole", Packaging="Ammo Pack", Technical Reference=ATBC110101M010DSPA3B000
C34: library part 885012004008, "WCAP-CSGP Multilayer Ceramic Chip Capacitor, General Purpose, size 0201, NP0 Class I, 1uF, 25VDC", Capacitance=22pF, Capacitance Tolerance=+/-5%, Case/Size Code=0201, Insulation Resistance=10GΩ, Manufacturer="Wurth Elektronik", Operating Temperature Max=125°C, Operating Temperature Min=-55°C, Rated Voltage (DC)=25V, Category="Multilayer Ceramic Chip Capacitors", Ceramic Type="NP0 Class I", ComponentLink1Description="Website Link", ComponentLink1URL=https://www.we-online.com/redexpert/article/885012004008?ad, ComponentLink2Description="Datasheet Link", ComponentLink2URL=https://www.we-online.com/redexpert/spec/885012004008?ad, Height=0.3mm, Length=0.6mm, Manufacturer Part Number=885012004008, Match Code=WCAP-CSGP, Mount="Surface Mount", Packaging="Tape and Reel", Q Factor=840, Technical Reference=NP00201220J025DFCT10000, Width=0.3mm
C35: library part 885012004008, "WCAP-CSGP Multilayer Ceramic Chip Capacitor, General Purpose, size 0201, NP0 Class I, 100nF, 25VDC", Capacitance=22pF, Capacitance Tolerance=+/-5%, Case/Size Code=0201, Insulation Resistance=10GΩ, Manufacturer="Wurth Elektronik", Operating Temperature Max=125°C, Operating Temperature Min=-55°C, Rated Voltage (DC)=25V, Category="Multilayer Ceramic Chip Capacitors", Ceramic Type="NP0 Class I", ComponentLink1Description="Website Link", ComponentLink1URL=https://www.we-online.com/redexpert/article/885012004008?ad, ComponentLink2Description="Datasheet Link", ComponentLink2URL=https://www.we-online.com/redexpert/spec/885012004008?ad, Height=0.3mm, Length=0.6mm, Manufacturer Part Number=885012004008, Match Code=WCAP-CSGP, Mount="Surface Mount", Packaging="Tape and Reel", Q Factor=840, Technical Reference=NP00201220J025DFCT10000, Width=0.3mm
D1 D2 D3 D4 D5 D6 D7 D8 D9 D10 D11 D12 D13 D14 D15 D16: "Diode Standard 75V 200mA Surface Mount SOD-523F", Package="AXIAL LEAD-2 ON Semiconductor", Availability="In Stock", Check_prices=https://www.snapeda.com/parts/1N4148/Onsemi/view-part/?ref=eda, MF="ON Semiconductor", MP=1N4148, Price=None, Purchase-URL=https://pricing.snapeda.com/search/part/1N4148/?ref=eda, SnapEDA_Link=https://www.snapeda.com/parts/1N4148/Onsemi/view-part/?ref=snap
IC1: "J-FET Amplifier 1 Circuit 8-SO", Package="SOIC-8 STMicroelectronics", Availability=Unavailable, MF=STMicroelectronics, MP=TL071, Price=None, SnapEDA_Link=https://www.snapeda.com/parts/TL071/STMicroelectronics/view-part/1566080/?ref=snap
IC2 IC3 IC4 IC5: "Dual, 30-V, 3-MHz, high slew rate (13-V/Âµs), In to V+, JFET-input op amp", Package="PDIP-8 Texas", Availability="In Stock", Check_prices=https://www.snapeda.com/parts/TL072IP/Texas+Instruments/view-part/?ref=eda, MF="Texas Instruments", MP=TL072IP, Price=None, Purchase-URL=https://pricing.snapeda.com/search/part/TL072IP/?ref=eda, SnapEDA_Link=https://www.snapeda.com/parts/TL072IP/Texas+Instruments/view-part/?ref=snap
IC6: "Standard Regulator Pos 1.2V to 37V 0.25A 3-Pin(3+Tab) TO-220 Tube", Package=None, Availability="In Stock", Check_prices=https://www.snapeda.com/parts/LM317/Onsemi/view-part/?ref=eda, MF="ON Semiconductor", MP=LM317, Price=None, Purchase-URL=https://pricing.snapeda.com/search/part/LM317/?ref=eda, SnapEDA_Link=https://www.snapeda.com/parts/LM317/Onsemi/view-part/?ref=snap
J1: library part PJ-313, "3,5cm jack", Package=None, Availability="Not in stock", Check_prices=https://www.snapeda.com/parts/PJ313/ADC+Telecommunications/view-part/?ref=eda, MF="ADC Telecommunications", MP=PJ313, Price=None, SnapEDA_Link=https://www.snapeda.com/parts/PJ313/ADC+Telecommunications/view-part/?ref=snap
J2 J3 J22: library part "2 pin header", "HEADER, 2 CONTACTS, 1 ROW, THROUGH HOLE, 2.54 MM; Connector Systems:Board-to-Board; Pitch Spacing:2.54mm; No. of Rows:1Rows; No. of Contacts:2Contacts; Contact Termination Type:Through Hole; Product Range:HTSW Series; Gender:Header RoHS Compliant: Yes", Package=None, Availability="In Stock", Check_prices=https://www.snapeda.com/parts/HTSW10207TMS/Samtec/view-part/?ref=eda, MF=Samtec, MP=HTSW10207TMS, Price=None, Purchase-URL=https://pricing.snapeda.com/search/part/HTSW10207TMS/?ref=eda, SnapEDA_Link=https://www.snapeda.com/parts/HTSW10207TMS/Samtec/view-part/?ref=snap
J4 J5 J6 J7 J8 J9 J10 J11 J12 J13 J14 J15 J16 J17 J18 J19 J20 J21: "2 pin header Jumper", Package=None, Availability="In Stock", Check_prices=https://www.snapeda.com/parts/HTSW10207TMS/Samtec/view-part/?ref=eda, MF=Samtec, MP=HTSW10207TMS, Price=None, Purchase-URL=https://pricing.snapeda.com/search/part/HTSW10207TMS/?ref=eda, SnapEDA_Link=https://www.snapeda.com/parts/HTSW10207TMS/Samtec/view-part/?ref=snap
LD00 LD01 LD02 LD03 LD04 LD05 LD06 LD07 LD08 LD09 LD10 LD11 LD12 LD13 LD14 LD15 LD16 LD17 LD18 LD19 LD20 LD21 LD22 LD23 LD24 LD25 LD26 LD27 LD28 LD29 LD30 LD31 LD32 LD33 LD34 LD35 LD36 LD37 LD38 LD39 LD40 LD41 LD42 LD43 LD44 LD45 LD46 LD47 LD48 LD49 LD50 LD51 LD52 LD53 LD54 LD55 LD56 LD57 LD58 LD59 LD60 LD61 LD62 LD63 LD64 LD65 LD66 LD67 LD68 LD69 LD70 LD71 LD72 LD73 LD74 LD75 LD76 LD77 LD78 LD79: "Green 569nm LED Indication - Discrete 1.9V Radial", Package=None, Availability="In Stock", Check_prices=https://www.snapeda.com/parts/TLLG4400/Vishay/view-part/?ref=eda, MF="Vishay Semiconductors", MP=TLLG4400, Price=None, Purchase-URL=https://pricing.snapeda.com/search/part/TLLG4400/?ref=eda, SnapEDA_Link=https://www.snapeda.com/parts/TLLG4400/Vishay/view-part/?ref=snap
R1 R2 R3 R5 R10 R11 R14 R15 R17 R22 R23 R26 R27 R33 R39 R40 R44 R45 R50 R56 R57 R61 R62 R66: library part "RESISTOR 0805", "4,7k Resistor 0805", Manufacturer="Vishay Dale", Part Number=TNPW080510K0BETA
R4: library part "RESISTOR 0805", "100Ohm Resistor 0805", Manufacturer="Vishay Dale", Part Number=TNPW080510K0BETA
R6 R30 R47: library part "RESISTOR 0805", "22k Resistor 0805", Manufacturer="Vishay Dale", Part Number=TNPW080510K0BETA
R7 R18 R31 R35 R49 R52 R65 R68: library part "RESISTOR 0805", "1,2k Resistor 0805", Manufacturer="Vishay Dale", Part Number=TNPW080510K0BETA
R8 R19 R32 R34 R48 R51 R64 R67: library part "RESISTOR 0805", "910 Resistor 0805", Manufacturer="Vishay Dale", Part Number=TNPW080510K0BETA
R9: library part "RESISTOR 0805", "20k Resistor 0805", Manufacturer="Vishay Dale", Part Number=TNPW080510K0BETA
R12 R24: library part "RESISTOR 0805", "75k Resistor 0805", Manufacturer="Vishay Dale", Part Number=TNPW080510K0BETA
R13: library part "RESISTOR 0805", "390 Resistor 0805", Manufacturer="Vishay Dale", Part Number=TNPW080510K0BETA
R16: library part "RESISTOR 0805", "150k Resistor 0805", Manufacturer="Vishay Dale", Part Number=TNPW080510K0BETA
R20: library part "RESISTOR 0805", "43Ohm Resistor 0805", Manufacturer="Vishay Dale", Part Number=TNPW080510K0BETA
R21: library part "RESISTOR 0805", "16,2k Resistor 0805", Manufacturer="Vishay Dale", Part Number=TNPW080510K0BETA
R25: library part "RESISTOR 0805", "301 Resistor 0805", Manufacturer="Vishay Dale", Part Number=TNPW080510K0BETA
R28: library part "RESISTOR 0805", "120k Resistor 0805", Manufacturer="Vishay Dale", Part Number=TNPW080510K0BETA
R29: library part "RESISTOR 0805", "8,2k Resistor 0805", Manufacturer="Vishay Dale", Part Number=TNPW080510K0BETA
R36: library part "RESISTOR 0805", "16.2k Resistor 0805", Manufacturer="Vishay Dale", Part Number=TNPW080510K0BETA
R37: library part "RESISTOR 0805", "82Ohm Resistor 0805", Manufacturer="Vishay Dale", Part Number=TNPW080510K0BETA
R38 R53: library part "RESISTOR 0805", "33k Resistor 0805", Manufacturer="Vishay Dale", Part Number=TNPW080510K0BETA
R41: library part "RESISTOR 0805", "30k Resistor 0805", Manufacturer="Vishay Dale", Part Number=TNPW080510K0BETA
R42: library part "RESISTOR 0805", "150 Resistor 0805", Manufacturer="Vishay Dale", Part Number=TNPW080510K0BETA
R43: library part "RESISTOR 0805", "56k Resistor 0805", Manufacturer="Vishay Dale", Part Number=TNPW080510K0BETA
R54: library part "RESISTOR 0805", "160Ohm Resistor 0805", Manufacturer="Vishay Dale", Part Number=TNPW080510K0BETA
R55: library part "RESISTOR 0805", "68k Resistor 0805", Manufacturer="Vishay Dale", Part Number=TNPW080510K0BETA
R58: library part "RESISTOR 0805", "47k Resistor 0805", Manufacturer="Vishay Dale", Part Number=TNPW080510K0BETA
R59: library part "RESISTOR 0805", "240 resistor 0805", Manufacturer="Vishay Dale", Part Number=TNPW080510K0BETA
R60: library part "RESISTOR 0805", "91k Resistor 0805", Manufacturer="Vishay Dale", Part Number=TNPW080510K0BETA
R63: library part "RESISTOR 0805", "36k Resistor 0805", Manufacturer="Vishay Dale", Part Number=TNPW080510K0BETA
R69: library part "RESISTOR 0805", "252 Resistor 0805", Manufacturer="Vishay Dale", Part Number=TNPW080510K0BETA
"U1 [8 kHz]" "U2 [64Hz]" "U3 [4 kHz]" "U4 [125Hz]" "U5 [2kHz]" "U6 [250Hz]" "U7 [1kHz]" "U8 [500Hz]": Package=None, Availability=Unavailable, MP=LM3914N-1, Price=None
VR1 VR2: library part 3362P-1-253LF, "25 kOhms 0.5W, 1/2W PC Pins Through Hole Trimmer Potentiometer Cermet 1 Turn Top Adjustment", Package="3116 Bourns", Availability=Good, Check_prices=https://www.snapeda.com/parts/3362P-1-253LF/Bourns/view-part/493663/?ref=eda, MF=Bourns, MP=3362P-1-253LF, Price=None, Purchase-URL=https://pricing.snapeda.com/search/part/3362P-1-253LF/?ref=eda, SnapEDA_Link=https://www.snapeda.com/parts/3362P-1-253LF/Bourns/view-part/493663/?ref=snap

## Free pads (board coordinates)
  round 200 hole 130: 28(6000,2850) 29(6000,150) 30(150,2850) 31(150,150)

## Via types
v1: diameter 50, hole 28, Top Layer to Bottom Layer, 101 vias

## Nets (pads, with @x,y where several pads share a name; then routed paths per layer and width w, separated by ;. In a path a pad name is that pad's centre, name@x,y a point inside that pad or via, vN(x,y) a via of type N, cw(c..) or ccw(c..) an arc to the next point about the centre after c; other vN are vias at no path point)
+5: C35.2 IC1.7 IC2.8 IC3.8 IC4.8 IC5.8 IC6.3 J22.2 R1.1 R10.2 R14.2 R22.2 R26.2 R39.2 R44.2 R56.2 R61.2 | length 11785.9
  Top Layer w10: IC6.3@219,1857 219,1820 204,1805 196,1805 171,1780 171,1609 267,1609 289,1631 356.86,1631 C35.2@397.86,1590 397.86,1478.86 ; J22.2@287,1368 397.86,1478.86 ; IC1.7@726,424 726,493 782,549 782,768.93 795.17,782.1 800,897.37 819.26,897.37 ; R14.2@760.63,1896 760.63,1886 780,1886 795,1871 795,1713 813,1695 813,1513 760,1513 704.06,1457.06 704.06,1411 440,1411 397.86,1453.14 ; R10.2@848.63,1397.5 848.63,1359.37 873,1335 873,1065 872,1064 872,897.37 R1.1@855,897.37 819.26,897.37 ; R22.2@1406.63,1294.82 1406.63,1355.63 1415,1364 1415,1689.3 IC2.8@1379.3,1725 1428,1725 1438,1735 R26.2@1487.63,1735 ; IC3.8@1983.3,1725 1983.3,1783.93 2242.37,2043 2242.37,2076.63 ; R44.2@2242.37,2129.18 2242.37,2076.63 ; R39.2@2253.37,1294.82 2253.37,1328 2310,1384.63 2310,1866 2276,1900 2276,2043 2242.37,2076.63 ; IC4.8@2587.3,1725 2623.96,1688.34 2623.96,1504.92 2610,1490.96 2602.96,1490.96 2552,1440 2552,1410 2575.16,1386.84 2764.84,1386.84 2768,1390 2768,1603 2840,1675 2879,1675 2913.95,1640.05 2913.95,1408.95 2888,1383 2888,1235.76 2856.24,1204 R56.2@2856.24,1170 ; IC5.8@3191.3,1725 3156,1689.7 3156,1400 3168,1388 3285,1388 3337,1440 3337,2287 3334,2290 3233.5,2290 3223.5,2280 R61.2@3223.5,2248 ; 397.86,1453.14 397.86,1478.86 ; 397.86,1453.14 397.86,1432 615,1214.86 615,1150 819.26,945.74 819.26,897.37
  Bottom Layer w10: J22.2@287,1368 235,1420 235,1504 260,1529 804,1529 853.25,1578.25 1232.55,1578.25 IC2.8@1379.3,1725 1415.3,1761 1947.3,1761 IC3.8@1983.3,1725 2019.3,1761 2551.3,1761 IC4.8@2587.3,1725 2623.3,1761 3155.3,1761 IC5.8@3191.3,1725
audio: J4.02 J5.01 J6.01 J7.01 J8.01 J9.01 J16.01 J17.01 J20.01 | length 5806.1
  Bottom Layer w10: J4.02@721,195 624,98 552,98 72,578 72,1867 120,1915 776,1915 861,2000 1060.46,2000 J5.01@1110.13,1950.33 1153.8,1994 1372.46,1994 J6.01@1416.13,1950.33 1462.8,1997 1674.46,1997 J7.01@1722.13,1949.33 1765.8,1993 1983.45,1993 J8.01@2027.12,1949.33 2081.79,2004 2284.46,2004 J20.01@2332.13,1956.33 2375.8,2000 2592.46,2000 J9.01@2636.13,1956.33 2755.8,2076 2923,2076 2935.13,2063.87 J16.01@2935.13,1955.33 2978.8,1999 3192.45,1999 J17.01@3236.12,1955.33
GND: "U1 [8 kHz].2" "U1 [8 kHz].4" "U2 [64Hz].2" "U2 [64Hz].4" "U3 [4 kHz].2" "U3 [4 kHz].4" "U4 [125Hz].2" "U4 [125Hz].4" "U5 [2kHz].2" "U5 [2kHz].4" "U6 [250Hz].2" "U6 [250Hz].4" "U7 [1kHz].2" "U7 [1kHz].4" "U8 [500Hz].2" "U8 [500Hz].4" C5.2 C9.2 C15.2 C17.2 C23.2 C25.2 C31.2 C33.2 C34.1 C35.1 D1.A D3.A D6.A D7.A D10.A D11.A D14.A D15.A IC1.4 IC2.4 IC3.4 IC4.4 IC5.4 J1.2_1 J1.2_2 J2.1 J3.1 J22.1 pad.28 pad.29 pad.30 pad.31 R2.2 R6.1 R8.2 R11.1 R15.2 R17.1 R19.2 R23.1 R27.2 R30.1 R32.2 R33.1 R34.2 R40.1 R45.2 R47.1 R48.2 R50.1 R51.2 R57.1 R62.2 R63.1 R64.2 R66.1 R67.2 VR2.2 VR2.3 | length 29503
  Top Layer w10: pad.31@150,150 150,439.07 J3.1@287.93,577 236,628.93 236,793.92 J2.1@287.93,845.86 ; pad.30@150,2850 258.37,2741.63 R19.2@258.37,2303 ; 465,2492.5 399.79,2427.29 C9.2@399.79,2259 302.37,2259 R19.2@258.37,2303 ; D3.A@522,2060.23 559.79,2060.23 574.8,2075.24 735.39,2075.24 R15.2@763.99,2046.64 ; IC1.4@526,724 526,734 599.12,807.12 R2.2@599.12,818.63 557.37,818.63 510,866 388.14,866 368,845.86 J2.1@287.93,845.86 ; VR2.2@567,1349 644,1272 R11.1@760.63,1272 760.63,1291 722.06,1329.57 722.06,1413.69 753.23,1444.86 C34.1@769.29,1444.86 ; R8.2@976.63,112 976.63,310 C5.2@998.63,332 998.63,402.37 998.63,570.63 D1.A@1012.89,584.89 ; D1.A@996,601.77 D1.A@1012.89,584.89 ; D6.A@1218,938.23 1180.23,976 1080,976 1069,965 1069,641 ; R32.2@1285.96,112 1285.96,154 1221.63,218.33 R6.1@1221.63,261 1221.63,300 ; C17.2@1466.79,300 1446.79,320 ; 1547.33,2492.5 1501.83,2538 1298,2538 1102,2342 1000,2342 953.63,2295.63 R27.2@953.63,2248 953.63,2212 822.5,2080.87 798.21,2080.87 R15.2@763.99,2046.64 ; R34.2@1599.63,673.06 1599.63,720 ; IC3.4@1670.7,1425 1670.7,1394.08 1682,1382.78 1682,1238.71 1643.29,1200 R23.1@1632.24,1169 1632.24,1114 1766,980.24 D7.A@1766,938.23 1730.34,902.57 1730.34,877.71 1698.26,845.63 1610,845.63 1599.63,835.26 R33.1@1599.63,801.12 1599.63,720 ; v1(1873,2567) 1884,2556 1884,2319 1899,2304 1914.14,2304 1920,2298.14 1920,2174 1945,2149 2012.5,2149 R45.2@2012.5,2129.18 ; R47.1@1966.63,926.82 R48.2@1966.63,801.12 1966.63,777.83 1995,777.83 2003,769.83 2003,597.25 1967,561.25 C23.2@1967,456 1967,430.32 2000.63,396.69 2000.63,300 ; R50.1@2000.63,261 2000.63,300 ; R63.1@2150.63,112 2150.63,147 2229.37,225.74 R51.2@2229.37,261 ; R40.1@2253.37,1169 2253.37,1213 2217,1249.37 2217,1367.3 IC4.4@2274.7,1425 ; D14.A@2461.9,204 D15.A@2461.9,315 ; C31.2@2472,456 2472,390.1 2461.9,380 D15.A@2461.9,315 ; 2629.67,2492.5 2724,2398.17 2724,2322 2691.37,2289.37 R62.2@2691.37,2248 ; C33.2@2691,456 2641.45,505.55 2641.45,899.68 D11.A@2680,938.23 2706.37,964.6 R57.1@2706.37,1042.82 ; R66.1@3225.63,1170 3225.63,1260 ; R67.2@3225.63,1294.82 3225.63,1260 ; 3712,118.5 3749,155.5 3749,675 3712,712 ; 3712,1899 3749,1862 3749,1511 3712,1474 3712,1305.5 3641.77,1235.27 3250.36,1235.27 3225.63,1260 ; 3912,712 3875.77,748.23 3875.77,1123 3912,1159.23 3912,1305.5 ; 3912,1899 3912,2067 3949,2104 3949,2455.5 3912,2492.5 ; pad.29@6000,150 6038,150 6038,852 5960,930 5960,2712 5990,2742 6000,2742 pad.28@6000,2850 ; R19.2@258.37,2303 258.37,2240 212,2193.63 212,2038 200,2026 179.63,2026 R17.1@179.63,2020 179.63,1961.63 153,1935 153,1591 180,1591 181,1590 C35.1@330.14,1590 330.14,1511.14 J22.1@287,1468 224.49,1405.49 J1.2_1@224.49,1228.02 297,1155.5 297,1052.5 J1.2_2@224.49,979.98 224.49,909.3 J2.1@287.93,845.86 ; R15.2@763.99,2046.64 760.63,2043.29 R15.2@760.63,2019 R15.2@763.99,2046.64 ; D1.A@1012.89,584.89 1069,641 ; 1069,641 1080,652 1142,652 1145,649 1145,395 1221.63,318.37 1221.63,300 ; 1221.63,300 1241.63,320 1446.79,320 ; 1446.79,320 1409.63,357.16 R30.1@1409.63,545 1409.63,624.58 1440,654.95 C15.2@1440,691 1490.37,741.37 1578.26,741.37 1599.63,720 ; 2000.63,300 2039.63,339 2190.37,339 2229.37,300 R51.2@2229.37,261 ; R51.2@2229.37,261 R64.2@2300.63,261 2300.63,300 2315.63,315 D15.A@2461.9,315